# Altium PCB LEDSequencer.PcbDoc
Units mm, origin at the board's own origin, x right, y up, seen from the top; angles counter-clockwise.
Board outline 61 x 30 mm, 2 copper layers (Top Layer, Bottom Layer), stack 1.671 mm thick; 28 components, 26 nets, 77 pads, 17 vias.
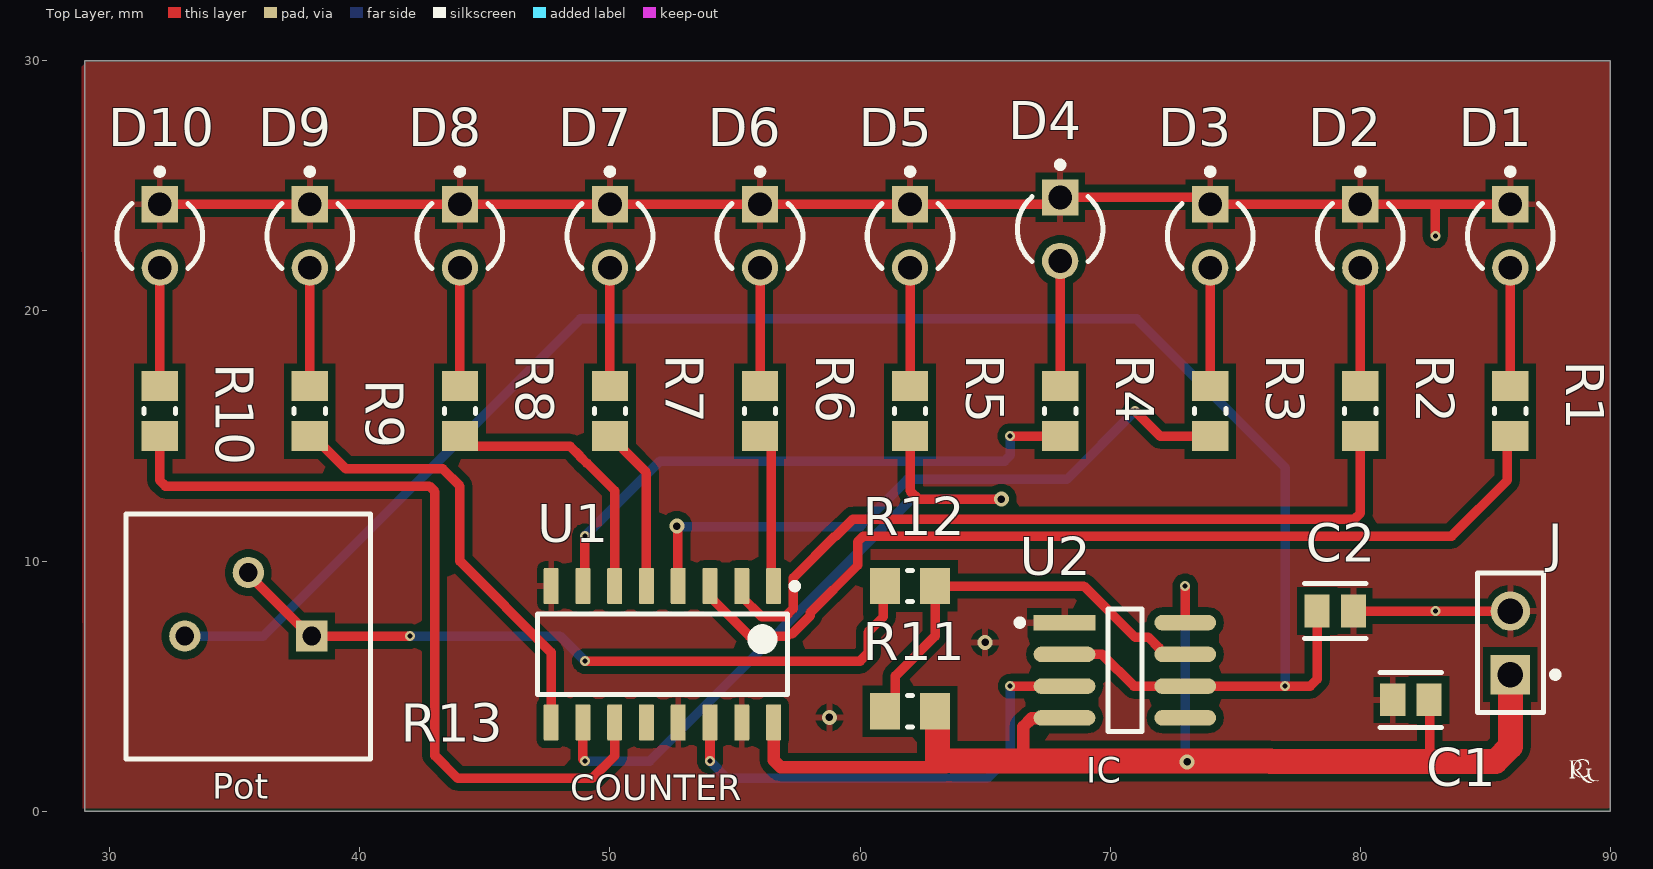
[diagram p0: Top Layer view]
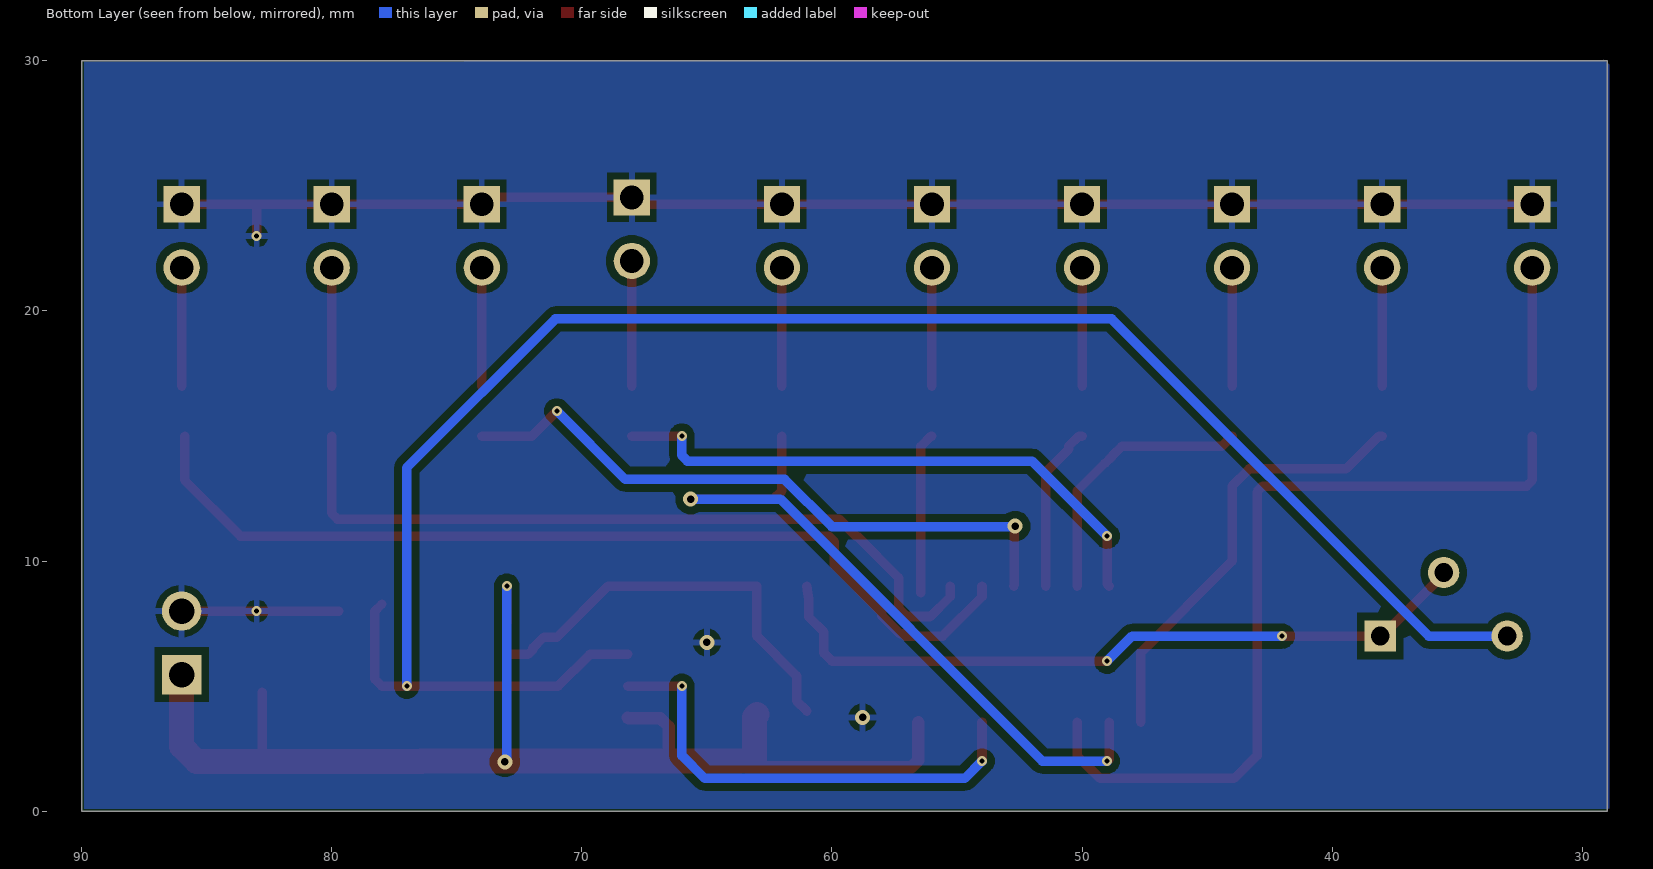
[diagram p1: Bottom Layer view, seen from below]
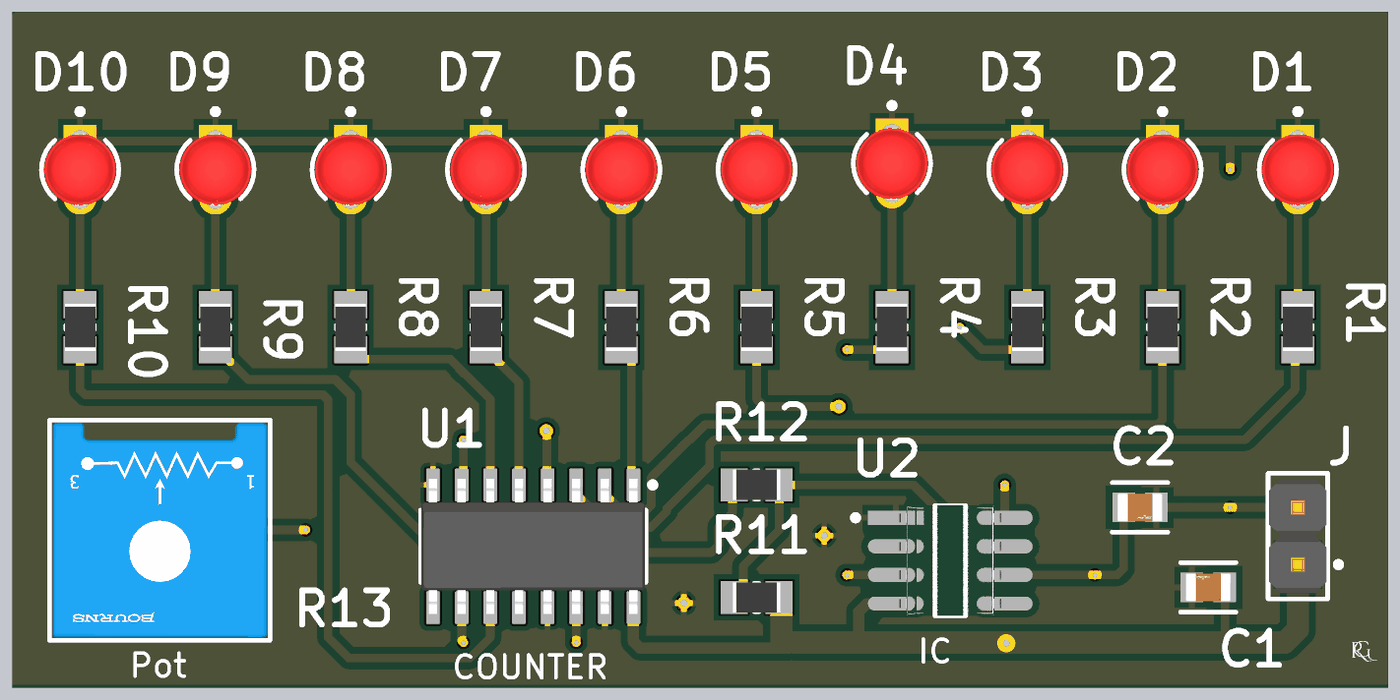
[diagram p2: 3D render of the assembled board from above, using the file's embedded part models]

## Layer stack, top to bottom
Top Solder: solder mask 0.0102, Solder Resist, Dk 3.5
Top Layer: signal copper 0.0356
Dielectric 1: dielectric 1.6, FR-4, Dk 4.8
Bottom Layer: signal copper 0.0356
Bottom Solder: solder mask 0.0102, Solder Resist, Dk 3.5

## Board outline
29,0 90,0 90,30 29,30

## Design rules (kind name [scope] priority, off if disabled: settings)
Clearance [All] p1: gap=0.3 ignorepadtopadclearanceinfootprint=FALSE
PolygonConnect [All] p1: connectstyle=Relief reliefconductorwidth=0.254 reliefentries=4 polygonreliefangle="90 Angle" airgapwidth=0.254
RoutingVias [All] p1: holewidth=0.3 width=0.6 viastyle="Through Hole" minholewidth=0.3 minwidth=0.6 maxholewidth=0.3 maxwidth=0.6
SilkToSolderMaskClearance [IsPad] p1: minsilkscreentomaskgap=0.1 clearancetoexposedcopper=TRUE
SolderMaskExpansion [All] p1: expansion=0.102 istentingtop=FALSE
SupplyNets "Schematic Supply Nets_1" [InNet('GND')] p1: voltage=0.000
SupplyNets "Schematic Supply Nets" [InNet('VCC')] p2: voltage=0.000
UnRoutedNet [All] p1: checkbadconnections=TRUE
Width [All] p1: maxlimit=1 minlimit=0.3 preferedwidth=0.5
28 further rules are at their usual default settings.

## Components (designator, comment, footprint, x,y, rotation, side; value= is the part's Value field where it differs from the comment)
C1 "1µF" FP-GCM21B-0_15-IPC_C 82.025,4.45 r180 top
C2 "1µF" FP-GCM21B-0_15-IPC_C 79,8 r0 top
D1 "HLMP-1301" FP-HLMP-1301-MFG 86,23 r270 top
D2 "HLMP-1301" FP-HLMP-1301-MFG 80,23 r270 top
D3 "HLMP-1301" FP-HLMP-1301-MFG 74,23 r270 top
D4 "HLMP-1301" FP-HLMP-1301-MFG 68,23.27 r270 top
D5 "HLMP-1301" FP-HLMP-1301-MFG 62,23 r270 top
D6 "HLMP-1301" FP-HLMP-1301-MFG 56,23 r270 top
D7 "HLMP-1301" FP-HLMP-1301-MFG 50,23 r270 top
D8 "HLMP-1301" FP-HLMP-1301-MFG 44,23 r270 top
D9 "HLMP-1301" FP-HLMP-1301-MFG 38,23 r270 top
D10 "HLMP-1301" FP-HLMP-1301-MFG 32,23 r270 top
J "M20-9990245" FP-M20-9990245-MFG 86,6.73 r90 top
R1 "1KΩ" RESC2013X60X35ML10T20 86,16 r90 top
R2 "1KΩ" RESC2013X60X35ML10T20 80,16 r90 top
R3 "1KΩ" RESC2013X60X35ML10T20 74,16 r90 top
R4 "1KΩ" RESC2013X60X35ML10T20 68,16 r90 top
R5 "1KΩ" RESC2013X60X35ML10T20 62,16 r90 top
R6 "1KΩ" RESC2013X60X35ML10T20 56,16 r90 top
R7 "1KΩ" RESC2013X60X35ML10T20 50,16 r90 top
R8 "1KΩ" RESC2013X60X35ML10T20 44,16 r90 top
R9 "1KΩ" RESC2013X60X35ML10T20 38,16 r90 top
R10 "1KΩ" RESC2013X60X35ML10T20 32,16 r90 top
R11 "2.2KΩ" RESC2013X60X35ML10T20 62,4 r0 top
R12 "10KΩ" RESC2013X60X35ML10T20 62,9 r0 top
R13 "50KΩ" FP-3386P-MFG 35.54,6.985 r180 top
U1 "CD4017BM" D0016A_N 52.095,6.275 r270 top (schematic designator U?)
U2 "NE555DR" FP-D0008A-IPC_A 70.586,5.635 r0 top

## Footprints (in the part's own frame and the unit in brackets; to place one, negate y for a bottom-side part, rotate by r counter-clockwise, add the part's x,y. Pads: shape width x height; smd on the part's side, far side on the other; paste and mask are expansions set on the pad)
D0016A_N [mm] "SOIC, 16-Leads, Body 10x4mm, Pitch 1.27mm, IPC Medium Density"
  rrect17% 1.45x0.6 smd: 1(-2.725,4.445) 2(-2.725,3.175) 3(-2.725,1.905) 4(-2.725,0.635) 5(-2.725,-0.635) 6(-2.725,-1.905) 7(-2.725,-3.175) 8(-2.725,-4.445) 9(2.725,-4.445) 10(2.725,-3.175) 11(2.725,-1.905) 12(2.725,-0.635) 13(2.725,0.635) 14(2.725,1.905) 15(2.725,3.175) 16(2.725,4.445)
  silkscreen extent -2.85,-5 1.6,5.42, body extent -3,-4.95 3,4.95, height 1.59
FP-3386P-MFG [mm]
  rect 1.25x1.25 hole 0.75 paste-2539.97 mask+0: 1(-2.54,-0.015)
  round 1.25 hole 0.75 paste-2539.97 mask+0: 2(0,-2.555) 3(2.54,-0.015)
  silkscreen extent -4.89,-4.89 4.89,4.89, body extent -4.99,-4.99 4.99,4.99, height 0.25
FP-D0008A-IPC_A [mm]
  rect 2.469x0.622 smd paste+0 mask+0: 1(-2.414,1.905)
  rrect100% 2.469x0.622 smd paste+0 mask+0: 2(-2.414,0.635) 3(-2.414,-0.635) 4(-2.414,-1.905) 5(2.414,-1.905) 6(2.414,-0.635) 7(2.414,0.635) 8(2.414,1.905)
  silkscreen extent -4.32,-2.45 0.68,2.45, body extent -4.15,-2.95 4.15,2.95, height 0.25
FP-GCM21B-0_15-IPC_C [mm]
  rect 1.006x1.308 smd paste+0 mask+0: 1(-0.726,0) 2(0.726,0)
  silkscreen extent -1.23,-1.1 1.23,1.1, body extent -1.33,-0.8 1.33,0.8, height 0.25
FP-HLMP-1301-MFG [mm]
  rect 1.45x1.45 hole 0.95 paste-2539.97 mask+0: 1(-1.27,0)
  round 1.45 hole 0.95 paste-2539.97 mask+0: 2(1.27,0)
  silkscreen extent -2.7,-1.71 1.3,1.71, body extent -2.22,-2.22 2.22,2.22, height 0.25
FP-M20-9990245-MFG [mm]
  rect 1.57x1.57 hole 1.02 paste-2539.97 mask+0: 1(-1.27,0)
  round 1.57 hole 1.02 paste-2539.97 mask+0: 2(1.27,0)
  silkscreen extent -2.79,-1.92 2.79,1.32, body extent -2.89,-1.42 2.89,1.42, height 0.25
RESC2013X60X35ML10T20 [mm] "Chip Resistor, 2-Leads, Body 2.1x1.35mm, IPC Low Density"
  rect 1.2x1.45 smd: 1(-1,0) 2(1,0)
  silkscreen extent -0.1,-0.63 0.1,0.63, body extent -1.05,-0.68 1.05,0.67, height 0.6

## Part data
C1 C2: library part CMP-2007-03354-2, "Ceramic Capacitor for Automotive 1uF ±10% 50VDC X7R 0805 Embossed T/R", Capacitance=1uF, Case Code (Imperial)=0805, Case Code (Metric)=2012, Dielectric=X7R, Max Operating Temperature=125°C, Min Operating Temperature=-55°C, Package Quantity=3000, Ratings=AEC-Q200, Tolerance=10%, Voltage Rating=50V, Case/Package=0805, Depth=1.2mm, Height=1.25mm, Lead Free="Lead Free", Length=2mm, Mount="Surface Mount", Packaging="Tape and Reel", Radiation Hardening=No, Termination=SMD/SMT, Thickness=0.055inch, Voltage Rating (DC)=50V, Weight=0.000335oz, Width=0.049inch
D1 D2 D3 D4 D5 D6 D7 D8 D9 D10: library part CMP-18399-000007-1, "LED RED DIFFUSED T-1 T/H", Colour=Red, Forward Current=10mA, Forward Voltage=1.9V, Manufacturer=Broadcom, Max Junction Temp=+110°C, Package=0, Reverse Voltage=5V, Temperature="-40°C to +100°C", Temperature Range High=+100°C, Temperature Range Low=-40°C, Automotive=No, Category=Diode, ComponentLink2Description=Datasheet, ComponentLink2URL=https://docs.broadcom.com/docs/AV02-1555EN, Device Class L1=Optoelectronics, Device Class L2=LEDs, Device Class L3=unset, Digikey Description="LED RED DIFFUSED T-1 T/H", Lead Free=Yes, Led Orientation=Straight, Luminous Intensity=3.4mcd, Manufacturer Part Number=HLMP-1301, Mouser Description="Standard LEDs - Through Hole Red Diffused 635nm 3.4mcd", Octopart=https://octopart.com/hlmp-1301-broadcom-71130345, Peak Emmision Wavelength=635nm, RoHS=TRUE, Viewing Angle=60°, Wavelength=626nm
J: library part CMP-15831-000105-1, "CONN HEADER VERT 2POS 2.54MM", Case/Package=SIL, Color=Black, Contact Resistance=25mR, Current=3A, Flammability Rating="UL94 V-0", Insulation Resistance=10GR, Max Operating Temperature=105°C, Min Operating Temperature=-40°C, Package Quantity=1000, Voltage=50V, Voltage Rating (AC)=750V, Connector Type="Male Pin", Contact Finish - Mating=GOLD, Contact Material=Brass, Contact Mating Length=0.24inch, Contact Plating=Gold, Contact Shape=Square, Contact Type="Male Pin", Current Rating=3A, Depth=2.54mm, Fastening Type=Pull, Gender=Male, Height=0.12inch, Housing Color=Black, Housing Material=Nylon, Insulation Color=Black, Insulation Material=Nylon, Lead Pitch=2.54mm, Length=5.08mm, Mated Stacking Heights=16.54mm, Mating Cycles=300, Max Current Rating=3A, Mount="Through Hole", Number of Contacts=2, Number of Poles=2, Number of Positions=2, Number of Rows=1, Orientation=Straight, Packaging=Bulk, Pitch=2.54mm, Radiation Hardening=No, Reach SVHC Compliant=Yes, Series=M20, Termination=Solder, Weight=0.25lb, Width=0.25inch, Working Voltage=750V
R1 R2 R3 R4 R5 R6 R7 R8 R9 R10 R11 R12: library part CMP-2100-03671-1, "Chip Resistor, 1 KOhm, +/- 1%, 125 mW, -55 to 155 degC, 0805 (2012 Metric), RoHS, Tape and Reel", Case Code (Imperial)=0805, Case Code (Metric)=2012, Manufacturer=Yageo, Max Operating Temperature=155degC, Max Power Dissipation=125mW, Min Operating Temperature=-55degC, Package Description="2-Pin Surface Mounted Device, Body 2 x 1.25 mm", Package Quantity=1, Resistance=1KOhm, Temperature Coefficient=100ppm/degreesC, Tolerance=1%, Voltage Rating=150V, Case/Package=0805, Composition=ThickFilm, Datasheet URL=http://www.yageo.com/NewPortal/yageodocoutput?fileName=/pdf/R-Chip/PYu-RC_Group_51_RoHS_L_5.pdf, Datasheet Version="Rev. 5, 10/2016", Depth=1.25mm, Height=0.024inch, Lead Free=LeadFree, Length=0.079inch, Manufacturer URL=http://www.yageo.com/, Military Standard=Not, Number of Pins=2, Number of Terminations=2, Package Reference=0805, Packaging=TapeandReel, Power Rating=125mW, REACH SVHC=Unknown, RoHSCompliant=true, Termination=SMD/SMT, Voltage Rating (DC)=150V, Width=0.049inch
R13: library part CMP-2000-05592-8, "TRIMMER 100K OHM 0.5W PC PIN TOP", Color=Blue, Manufacturer Series=3386, Max Operating Temperature=125°C, Max Power Dissipation=500mW, Min Operating Temperature=-55°C, Package Quantity=100, Resistance=100kR, Resistance Law=Linear, Resistance Tolerance=10%, Resistor Type=Cermet, Temperature Coefficient=100ppm/°C, Voltage Rating=300V, Actuator Orientation=Vertical, Actuator Type=SCREW, Contact Plating=Tin, Depth=9.53mm, Height=4.83mm, Lead Free="Contains Lead", Length=9.53mm, Military Standard=Not, Mount="Through Hole", Number of Pins=3, Number of Terminals/Pins=3, Number of Turns=1, Packaging=Rail/Tube, Power Rating=500mW, Radiation Hardening=No, Reach SVHC Compliant=Yes, RoHS Compliant=Yes, Series="Trimpot® 3386 - Sealed", Taper=Linear, Technology=CERMET, Terminal Finish=Tin, Termination=Pin, Tolerance=10%, Type=Potentiometer, Weight=0.03oz, Width=9.53mm
U1: library part CMP-1623-00071-2, "CMOS Decade Counter with 10 Decoded Outputs, D0016A, TUBE", F @ Nom Voltage(Max)(Mhz)=8, Generic Part Number=CD4017B, ICC @ Nom Voltage(Max)(mA)=0.03, Manufacturer="Texas Instruments", Operating Temperature Range(C)="-55 to 125", Rating=Military, tpd @ Nom Voltage(Max)(ns)=270, Voltage(Nom)(V)=10, Bits(#)=10, Code_JEDEC="MS-012 variation AC", DatasheetVersion=SCHS027C, Function=Counter, Input Type=CMOS, Inputs=1, Output Drive (IOL/IOH)(Max)(mA)=1.5/-1.5, Output Type=CMOS, PackageReference=D0016A, Schmitt Trigger=No, Technology Family=CD4000, Type=Decade, VCC(Max)(V)=18, VCC(Min)(V)=3
U2: library part CMP-1685-00007-2, "IC OSC SGL TIMER 100KHZ 8-SOIC", Case/Package=SOIC, Frequency=100kHz, High Level Output Current=-200mA, Low Level Output Current=200mA, Max Operating Temperature=70°C, Max Supply Voltage=16V, Min Operating Temperature=0°C, Min Supply Voltage=4.5V, Operating Supply Current=10mA, Package Quantity=2500, Quiescent Current=15mA, Contact Plating=Gold, Height=1.58mm, Lead Free="Lead Free", Length=4.9mm, Mount="Surface Mount", Number of Pins=8, Number of Timers/Counters=1, Packaging="Tape and Reel", Radiation Hardening=No, REACH SVHC="No SVHC", Weight=0.002561oz, Width=3.91mm

## Via types
v1: diameter 0.4, hole 0.2, Top Layer to Bottom Layer, 12 vias
v2: diameter 0.6, hole 0.3, Top Layer to Bottom Layer, 5 vias

## Nets (pads, with @x,y where several pads share a name; then routed paths per layer and width w, separated by ;. In a path a pad name is that pad's centre, name@x,y a point inside that pad or via, vN(x,y) a via of type N, cw(c..) or ccw(c..) an arc to the next point about the centre after c; other vN are vias at no path point)
GND: C1.2 C2.2 D1.1 D2.1 D3.1 D4.1 D5.1 D6.1 D7.1 D8.1 D9.1 D10.1 J.2 U1.8 U1.13 U1.15 U2.1 | length 61.8
  Top Layer w0.381: D10.1 D9.1 D8.1 D7.1 D6.1 D5.1 67.73,24.27 D4.1 73.73,24.54 D3.1 D2.1 83,24.27 ; C2.2 v1(83,8) J.2 ; v1(83,23) 83,24.27 ; D1.1 83,24.27
  other v2: 58.775,3.75 65,6.75
NetC2_1: C2.1 R13.3 U2.2 U2.6 | length 74.3
  Top Layer w0.381: U2.2 69.68,6.27 70.95,5 U2.6 v1(77,5) 78,5 78.274,5.274 C2.1 C2.1@78,8.274
  Bottom Layer w0.381: R13.3 36.136,7 48.817,19.681 71.059,19.681 77,13.74 v1(77,5)
NetD1_2: D1.2 R1.2 | length 4.7
  Top Layer w0.381: R1.2 D1.2
NetD2_2: D2.2 R2.2 | length 4.7
  Top Layer w0.381: R2.2 D2.2
NetD3_2: D3.2 R3.2 | length 4.7
  Top Layer w0.381: R3.2 D3.2
NetD4_2: D4.2 R4.2 | length 5
  Top Layer w0.381: R4.2 D4.2
NetD5_2: D5.2 R5.2 | length 4.7
  Top Layer w0.381: R5.2 D5.2
NetD6_2: D6.2 R6.2 | length 4.7
  Top Layer w0.381: R6.2 D6.2
NetD7_2: D7.2 R7.2 | length 4.7
  Top Layer w0.381: R7.2 D7.2
NetD8_2: D8.2 R8.2 | length 4.7
  Top Layer w0.381: R8.2 D8.2
NetD9_2: D9.2 R9.2 | length 4.7
  Top Layer w0.381: R9.2 D9.2
NetD10_2: D10.2 R10.2 | length 4.7
  Top Layer w0.381: R10.2 D10.2
NetR1_1: R1.1 U1.3 | length 37.9
  Top Layer w0.381: U1.3 54,8.575 55.575,7 57.075,7 57.178,7.104 57.295,7.104 58.011,7.82 58.011,7.937 59.909,9.835 59.909,10.777 60.133,11 83.652,11 85.875,13.223 R1.1@85.875,15
NetR2_1: R2.1 U1.2 | length 31
  Top Layer w0.381: U1.2 55.27,8.575 56.061,7.785 57.013,7.785 57.331,8.102 57.331,9.33 59,11 59.037,11 59.718,11.681 79.777,11.681 80,11.904 R2.1
NetR3_1: R3.1 U1.4 | length 26.1
  Top Layer w0.381: v2(52.675,11.4) 52.703,11.372 52.703,9.028 U1.4 ; v1(71,16) 72,15 R3.1
  Bottom Layer w0.381: v2(52.675,11.4) 52.7,11.375 60.001,11.375 61.892,13.265 68.265,13.265 v1(71,16)
NetR4_1: R4.1 U1.7 | length 23.1
  Top Layer w0.381: U1.7 48.996,9.076 48.996,10.996 v1(49,11) ; v1(66,15) R4.1
  Bottom Layer w0.381: v1(49,11) 52,14 65.777,14 66,14.223 v1(66,15)
NetR5_1: R5.1 U1.10 | length 28.6
  Top Layer w0.381: U1.10 48.92,2.08 v1(49,2) ; R5.1 62,12.805 62.33,12.475 v2(65.65,12.475)
  Bottom Layer w0.381: v1(49,2) 51.589,2 62.064,12.475 v2(65.65,12.475)
NetR6_1: R6.1 U1.1 | length 6.5
  Top Layer w0.381: R6.1 56.035,15 56.445,14.59 U1.1@56.445,8.725
NetR7_1: R7.1 U1.5 | length 6.7
  Top Layer w0.381: R7.1 50.125,15 50.534,14.59 50.534,14.466 51.46,13.54 U1.5
NetR8_1: R8.1 U1.6 | length 10.9
  Top Layer w0.381: R8.1 44.41,14.59 48.41,14.59 48.784,14.216 48.784,14.197 49.072,13.909 49.091,13.909 50.19,12.81 U1.6
NetR9_1: R9.1 U1.9 | length 17.8
  Top Layer w0.381: R9.1 38.125,15 39.441,13.684 43.316,13.684 44,13 44,10 47.65,6.35 U1.9
NetR10_1: R10.1 U1.11 | length 32.8
  Top Layer w0.381: R10.1 32,13.223 32.223,13 42.777,13 43,12.777 43,2.223 43.914,1.31 49.286,1.31 50.19,2.213 U1.11
NetR11_1: R11.1 R12.2 U2.7 | length 17
  Top Layer w0.381: R11.1 61.41,4.41 61.41,5.41 63,7 R12.2 68.952,9 71,6.952 71.531,6.952 71.956,6.527 71.956,6.456 72.142,6.27 U2.7
NetR12_1: R12.1 R13.1 R13.2 | length 29.3
  Top Layer w0.381: R13.2@35.46,9.54 R13.1@38,7 ; R13.1 v1(42,7) ; v1(49,6) 60,6 60.319,6.319 60.319,7.157 60.927,7.765 60.927,8.465 R12.1
  Bottom Layer w0.381: v1(42,7) 48,7 v1(49,6)
NetU2_3: U1.14 U2.3 | length 19.2
  Top Layer w0.381: v1(54,2) U1.14 ; v1(66,5) U2.3
  Bottom Layer w0.381: v1(54,2) 54.691,1.31 65.086,1.31 66,2.223 v1(66,5)
VCC: C1.1 J.1 R11.2 U1.16 U2.4 U2.8 | length 50.6
  Top Layer w0.381: U2.8 v1(73,9) ; 82.775,1.995 C1.1@82.775,4.758
  Top Layer w0.5: U1.16 56.54,2.043 56.833,1.75 63.436,1.75 63.686,2 ; 66.525,2 66.525,3.376 66.856,3.707 68.149,3.707 U2.4
  Top Layer w1: R11.2@63,3.875 63.1,3.775 63.1,2.086 ; 63.686,2 66.525,2 76.414,2 76.419,1.995 82.775,1.995 85.414,1.995 86,2.581 J.1
  Bottom Layer w0.381: v1(73,9) 73,2.04 v2(73.073,1.967)
pads on no net: U1.12 U2.5

## Polygon pours and split planes (outlines as drawn)
GND on Bottom Layer "GND_L02_P001" (solid, pour order 1): 28.925,30.05 28.925,0.125 28.95,0.1 89.9,0.1 89.9,29.975
GND on Top Layer "GND_L01_P000" (solid, pour order 0): 28.875,29.975 28.925,29.975 89.975,29.975 89.975,0.075 89.925,0.125 28.925,0.125

## Silkscreen, mask and mechanical layers (free items; w line width, h text height)
Top Overlay:
  region: 1442 vertices and 3 holes, not listed, extent 88.367,1.142 89.538,2.071
  text "IC" at 69.052,1.127 h1.02
  text "Pot" at 34.102,0.502 h1.02
  text "COUNTER" at 48.402,0.427 h1.02